# Altium PCB CU.PcbDoc
Units mil, origin at the board's own origin, x right, y up, seen from the top; angles counter-clockwise.
Board outline 2559.06 x 1574.8 mil, 2 copper layers (Top Layer, Bottom Layer); 36 components, 43 nets, 187 pads, 3 vias.
Unrouted connection lines stored in the file: 3.
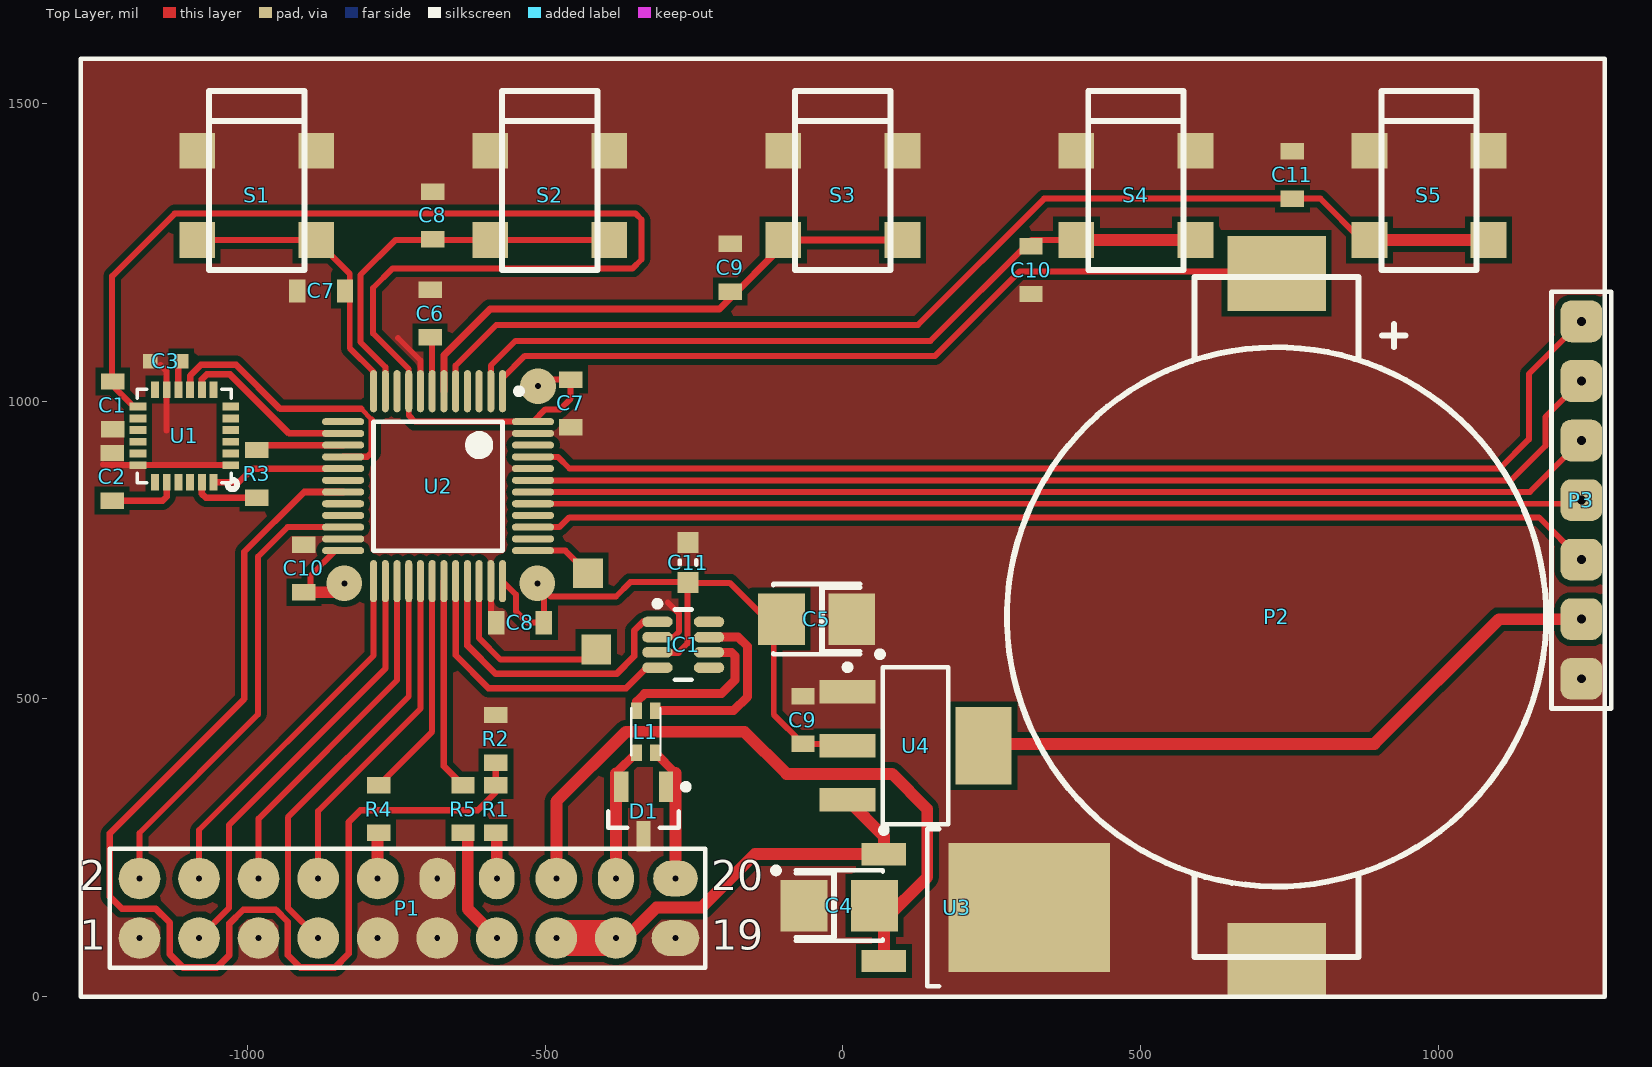
[diagram p0: Top Layer view]
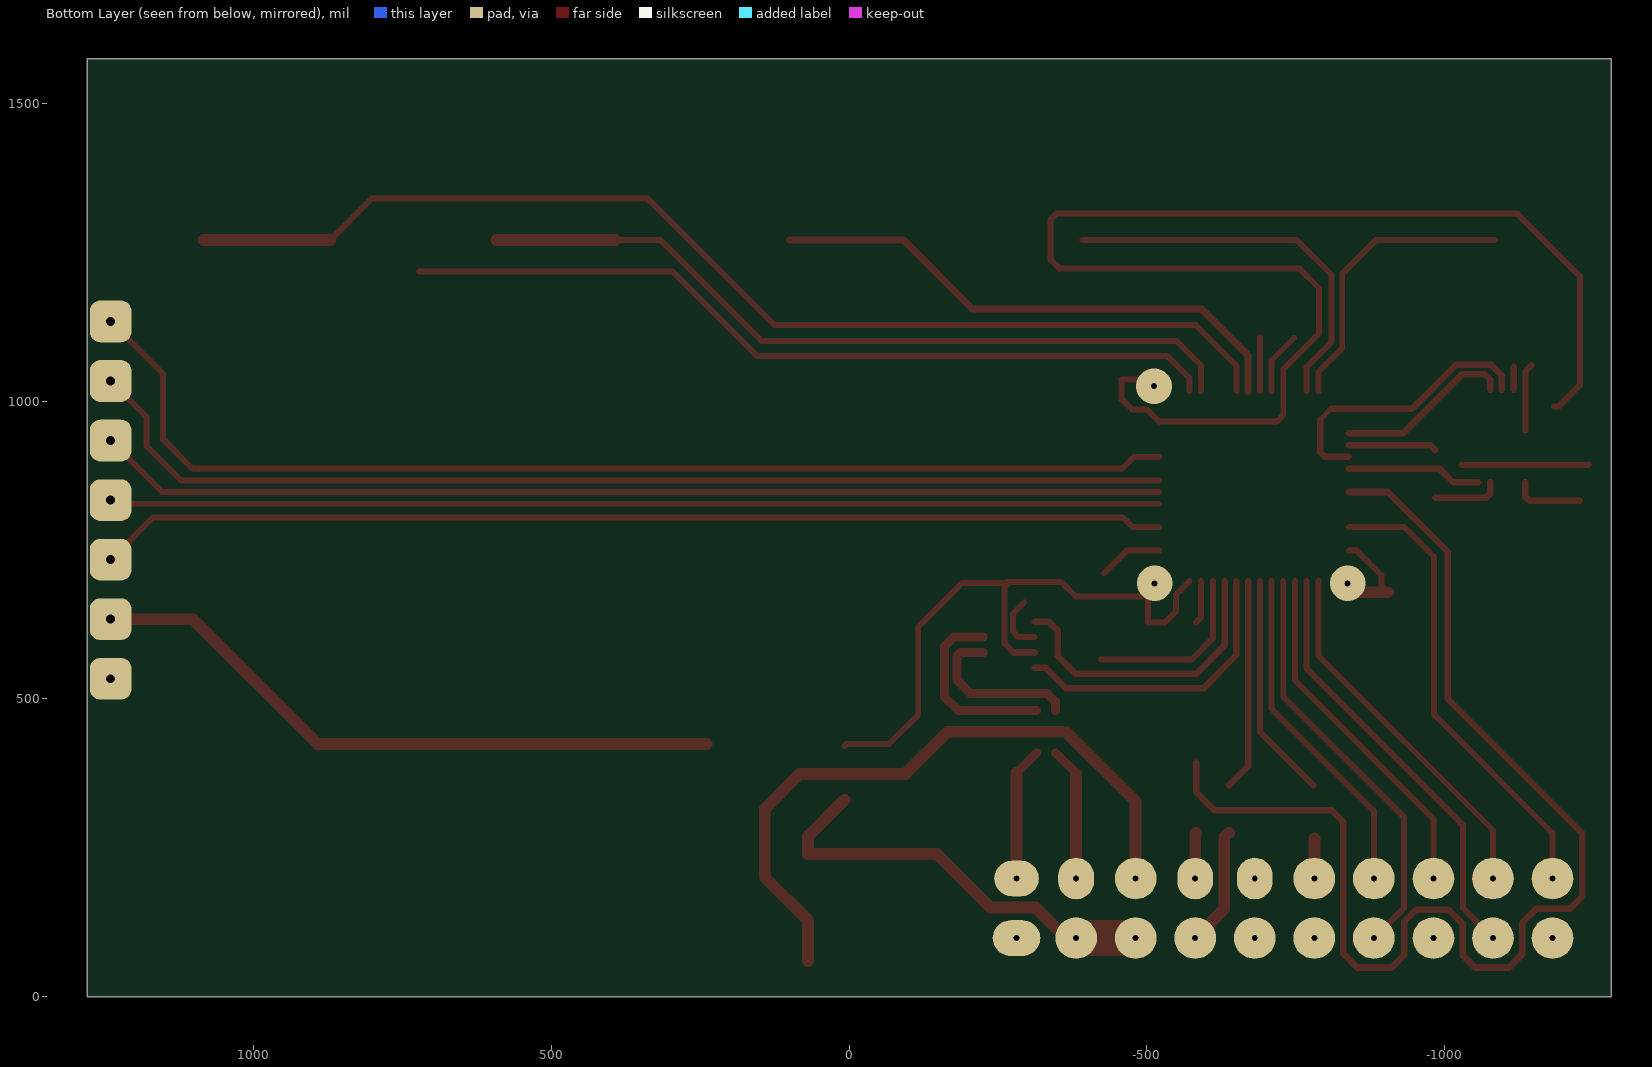
[diagram p1: Bottom Layer view, seen from below]

## Layer stack, top to bottom
Top Solder: solder mask 0.4, Solder Resist, Dk 3.5
Top Layer: signal copper 1.4
Dielectric 1: dielectric 12.6, FR-4, Dk 4.8
Bottom Layer: signal copper 1.4
Bottom Solder: solder mask 0.4, Solder Resist, Dk 3.5

## Board outline
-1279.53,0 1279.53,0 1279.53,1574.8 -1279.53,1574.8

## Design rules (kind name [scope] priority, off if disabled: settings)
Clearance [All] p1: gap=5 except(10: Arc-Poly Track-Poly SMDPad-Poly THPad-Poly Via-Poly Fill-Poly Poly-Poly)
ComponentClearance [All] p1 off: gap=10 collisioncheckmode=3 verticalgap=10 showdistances=FALSE
Height [All] p1 off: minheight=0 maxheight=1000 prefheight=500
PolygonConnect [All] p1: connectstyle=Direct reliefconductorwidth=10 reliefentries=4 polygonreliefangle="90 Angle" airgapwidth=10
RoutingVias [All] p1: holewidth=28 width=60 viastyle="Through Hole" minholewidth=1 minwidth=1 maxholewidth=280 maxwidth=500
SolderMaskExpansion [All] p1: expansion=4
Width [All] p1: maxlimit=200 minlimit=5 preferedwidth=10
28 further rules are at their usual default settings.

## Classes and differential pairs
net class CAN: CAN_RX CAN_TX

## Components (designator, comment, footprint, x,y, rotation, side; value= is the part's Value field where it differs from the comment)
C1 "Cap402" 0603x -1226,993 r90 top
C2 "Cap603" 0603x -1227,873 r270 top
C3 "Cap402" 0402x -1137,1067 r180 top
C4 "Cap" RR_B -6,153 r0 top
C5 "Cap" RR_B -44,634 r180 top
C6 "Cap" 0603x -693,1147 r270 top
C7 "Cap" 0603x -876,1185 r180 top
C7 "Cap" 0603x -457.02,996.17 r90 top
C8 "Cap" 0603x -689,1312 r90 top
C8 "Cap" 0603x -542.02,628.17 r0 top
C9 "Cap" 0603x -189,1224 r90 top
C9 "Cap" 0603x -66.93,464.57 r270 top
C10 "Cap" 0603x 316,1220 r270 top
C10 "Cap" 0603x -905.02,719.17 r270 top
C11 "Cap" 0603x 755,1380 r90 top
C11 "0.1u" CAPC1608X08N(0603) -260,729 r270 top
D1 "NUP2105LT1G" SOT23_N -334.65,311.02 r270 top
IC1 "TCAN332GDCNT" SOT23-8_L -268,591 r0 top
L1 "CMC 100MA 2LN 90 OHM SMD" Choke_smd -330.71,444.88 r90 top
P1 "Header 10X2" HDR2X10 -1181.1,98.43 r0 top
P2 "Header 2" RR_CONN_2032 728.35,637.8 r270 top
P3 "Header 7" HDR1X7 1240.16,1133.86 r270 top locked
R1 "Res1" 0603x -582.68,314.96 r90 top
R2 "Res1" 0603x -582.68,433.07 r90 top
R3 "Res1" 0603x -984,878 r90 top
R4 "Res1" 0603x -779.53,314.96 r90 top
R5 "Res1" 0603x -637.8,314.96 r90 top
S1 "SW-PB" BUTTON_SMD -984.25,1220.47 r180 top
S2 "SW-PB" BUTTON_SMD -492.13,1220.47 r180 top
S3 "SW-PB" BUTTON_SMD 0,1220.47 r180 top
S4 "SW-PB" BUTTON_SMD 492.13,1220.47 r180 top
S5 "SW-PB" BUTTON_SMD 984.25,1220.47 r180 top
U1 "MPU-6000" IMU-3000 -1105.83,941.64 r180 top
U2 "STM32F303C8T6" LQFP48_N -679.71,857.27 r270 top
U3 "LM78M05CDT/NOPB" TD03B_N 240.16,149.61 r0 top
U4 "LM1117IMP-5.0/NOPB" MP04A_N 122.05,421.26 r0 top

## Footprints (in the part's own frame and the unit in brackets; to place one, negate y for a bottom-side part, rotate by r counter-clockwise, add the part's x,y. Pads: shape width x height; smd on the part's side, far side on the other; paste and mask are expansions set on the pad)
0402x [mm] "Chip Capacitor, Body 1.0x0.5mm, IPC Medium Density"
  rect 0.6x0.6 smd: 1(-0.66,0) 2(0.66,0)
  body extent -0.5,-0.25 0.5,0.25, height 0.6
0603x [mm] "Chip Resistor; Body 1.6 x 0.8 mm (LxW typ)"
  rect 0.7x1 smd: 1(-1.016,0) 2(1.016,0)
BUTTON_SMD [mil]
  rect 60x60 smd: 1(-100,-200) 1(100,-200) 2(-100,-50) 2(100,-50)
  silkscreen extent -80,-300 80,0
CAPC1608X08N(0603) [mm] "Chip Capacitor, 2-Leads, Body 1,60x0,80mm, IPC Medium Density"
  rect 0.9x0.9 smd: 1(-0.85,0) 2(0.85,0)
  silkscreen extent -0.1,-0.35 0.1,0.35, body extent -0.8,-0.4 0.8,0.4, height 0.8
Choke_smd [mm] "Smd choke"
  rect 0.7x0.45 smd: 1(-0.9,0.4) 2(-0.9,-0.4) 3(0.9,-0.4) 4(0.9,0.4)
  silkscreen extent -1,-0.63 1,0.63
HDR1X7 [mil] "Connector; Header; 7 Position"
  rrect50% 70x70 hole 15: 1(0,0) 2(100,0) 3(200,0) 4(300,0) 5(400,0) 6(500,0) 7(600,0)
  silkscreen extent -50,-50 650,50
HDR2X10 [mil] "Connector; Header; 10x2 Position"
  round 70 hole 10: 1(0,0) 2(0,100) 3(100,0) 4(100,100) 5(200,0) 6(200,100) 7(300,0) 8(300,100) 9(400,0) 10(400,100) 11(500,0) 13(600,0) 15(700,0) 16(700,100) 17(800,0)
  oval 60x70 hole 10: 12(500,100) 14(600,100) 18(800,100)
  oval 80x60 hole 10: 19(900,0)
  oval 75x60 hole 10: 20(900,100)
  silkscreen extent -50,-50 950,150
IMU-3000 [mm]
  rect 0.711x0.337 smd paste-0.03 mask+0.04: 1(-1.975,1.25) 2(-1.975,0.75) 3(-1.975,0.25) 4(-1.975,-0.25) 5(-1.975,-0.75) 6(-1.975,-1.25) 13(1.975,-1.25) 14(1.975,-0.75) 15(1.975,-0.25) 16(1.975,0.25) 17(1.975,0.75) 18(1.975,1.25)
  rect 0.337x0.711 smd paste-0.03 mask+0.04: 7(-1.25,-1.975) 8(-0.75,-1.975) 9(-0.25,-1.975) 10(0.25,-1.975) 11(0.75,-1.975) 12(1.25,-1.975) 19(1.25,1.975) 20(0.75,1.975) 21(0.25,1.975) 22(-0.25,1.975) 23(-0.75,1.975) 24(-1.25,1.975)
  silkscreen extent -2.25,-2 2,2.27, body extent -2,-2 2,2, height 0.95
LQFP48_N [mm] "Thin QFP, 48-Leads, Body 7x7mm, Pitch 0.5mm, IPC Medium Density"
  oval 1.8x0.3 smd: 1(-4.05,2.75) 2(-4.05,2.25) 3(-4.05,1.75) 4(-4.05,1.25) 5(-4.05,0.75) 6(-4.05,0.25) 7(-4.05,-0.25) 8(-4.05,-0.75) 9(-4.05,-1.25) 10(-4.05,-1.75) 11(-4.05,-2.25) 12(-4.05,-2.75) 25(4.05,-2.75) 26(4.05,-2.25) 27(4.05,-1.75) 28(4.05,-1.25) 29(4.05,-0.75) 30(4.05,-0.25) 31(4.05,0.25) 32(4.05,0.75) 33(4.05,1.25) 34(4.05,1.75) 35(4.05,2.25) 36(4.05,2.75)
  oval 0.3x1.8 smd: 13(-2.75,-4.05) 14(-2.25,-4.05) 15(-1.75,-4.05) 16(-1.25,-4.05) 17(-0.75,-4.05) 18(-0.25,-4.05) 19(0.25,-4.05) 20(0.75,-4.05) 21(1.25,-4.05) 22(1.75,-4.05) 23(2.25,-4.05) 24(2.75,-4.05) 37(2.75,4.05) 38(2.25,4.05) 39(1.75,4.05) 40(1.25,4.05) 41(0.75,4.05) 42(0.25,4.05) 43(-0.25,4.05) 44(-0.75,4.05) 45(-1.25,4.05) 46(-1.75,4.05) 47(-2.25,4.05) 48(-2.75,4.05)
  silkscreen extent -4.17,-2.75 2.75,3.58, body extent -3.5,-3.5 3.5,3.5, height 1.6
MP04A_N [mm] "SOT223, 4-Leads, Body 6.5x3.5mm, Pitch 2.3mm, Lead Span 7mm, IPC Medium Density"
  rect 2.4x1 smd: 1(-2.9,2.3) 2(-2.9,0) 3(-2.9,-2.3)
  rect 2.4x3.3 smd: 4(2.9,0)
  silkscreen extent -3.02,-3.35 1.4,3.47, body extent -1.85,-3.35 1.85,3.35, height 1.8
RR_B [mm] "Capacitor, SM Tantalum; Body 3.5 x 2.8 mm (LxW typ)"
  rect 2x2.2 smd: 1(-1.5,0) 2(1.5,0)
  silkscreen extent -2.82,-1.5 1.85,1.62, body extent -1.5,-1.5 1.5,1.5, height 2.1
RR_CONN_2032 [mm]
  rect 3.2x4.2 smd: 1(-14.65,0) 2(14.65,0)
  silkscreen extent -14.5,-11.5 14.5,11.5, body extent -14.5,-11.51 14.48,11.51, height 4.8
SOT23-8_L [mm] "SOP, 8-Leads, Body 2.9x1.6mm, Pitch 0.65mm, IPC High Density"
  oval 1.3x0.45 smd: 1(-1.1,0.975) 2(-1.1,0.325) 3(-1.1,-0.325) 4(-1.1,-0.975) 5(1.1,-0.975) 6(1.1,-0.325) 7(1.1,0.325) 8(1.1,0.975)
  silkscreen extent -1.22,-1.5 0.35,1.87, body extent -0.88,-1.5 0.88,1.5, height 1.45
SOT23_N [mm] "SOT23, 3-Leads, Body 2.9x1.3mm, Pitch 0.95mm, Lead Span 2.3mm, IPC Medium Density"
  rect 1.3x0.6 smd: 1(-1.05,0.95) 2(-1.05,-0.95) 3(1.05,0)
  silkscreen extent -1.17,-1.5 0.7,1.92, body extent -0.7,-1.5 0.7,1.5, height 1.1
TD03B_N [mm] "D-PAK, 4-Leads, Body 6.1x6.6mm, Pitch 2.29mm, Lead Span 9.7mm, IPC Medium Density"
  rect 1.9x0.95 smd: 1(-4.35,2.28) 3(-4.35,-2.28)
  rect 6.9x5.5 smd: 4(1.85,0)
  silkscreen extent -4.47,-3.35 -2,3.43, body extent -2.5,-3.35 3.7,3.35, height 2.38

## Part data
C1 C2 C3: "Capacitor SMD"
C4 C5 C6 C7 C7 C8 C8 C9 C9 C10 C10 C11: "Capacitor"
C11: library part "Ceramic Chip Capacitor"
D1: library part BAT54A, "Schottky Barrier Double Diode"
L1: library part Choke
P1: "Header, 10-Pin, Dual row"
P2: "Header, 2-Pin"
P3: "Header, 7-Pin"
R1 R2 R3 R4 R5: "Resistor"
S1 S2 S3 S4 S5: "Switch"
U1: library part MPU-3/6000, "Invensense MPU-3/6000,  3-axis Gyros & Accel on 6000"
U2: library part STM32F103C6T6, "STM32 ARM-based 32-bit MCU with 32 Kbytes Flash, 48-pin LQFP, Industrial Temperature"
U3: "3-Terminal Positive Voltage Regulators, 3-pin TO-252, Pb-Free"
U4: "800mA Low-Dropout Linear Regulator, 4-pin SOT-223, Pb-Free"

## Free pads (board coordinates)
  rect 50x50 smd: 0(-428.02,711.17) 1(-414,583)

## Via types
v1: diameter 60, hole 10, Top Layer to Bottom Layer, 3 vias

## Nets (pads, with @x,y where several pads share a name; then routed paths per layer and width w, separated by ;. In a path a pad name is that pad's centre, name@x,y a point inside that pad or via, vN(x,y) a via of type N, cw(c..) or ccw(c..) an arc to the next point about the centre after c; other vN are vias at no path point)
3.3V: C1.2 C5.2 C7.2@-457.02,1036.17 C8.2@-502.02,628.17 C9.2@-66.93,424.57 C10.2@-905.02,679.17 C11.2@-260,695.54 IC1.3 P3.6 U1.13 U2.9 U2.24 U2.36 U2.48 U4.2 U4.4 | length 4675.5
  Top Layer w10: U1.13 -1190.85,990.85 -1227,1027 -1227,1210 -1122,1315 -348,1315 -338,1305 -338,1238 -353,1223 -756,1223 -789,1190 -789,1114 -728.92,1053.92 U2.9 -728.92,976.07 -718.39,965.54 U2.48 -499.63,986.17 -475.02,986.17 -457.02,1004.17 -457.02,1036.17 -501.02,1036.17 v1(-512.02,1025.17) ; C10.2@-905.02,679.17 -894.02,690.17 -894.02,707.17 -852.19,749 U2.24 ; U2.36 -549.02,675.4 -549.02,647.17 -530.02,628.17 -502.02,628.17 v1@-502.02,683.17 ; v1(-513.02,694.17) v1@-502.02,683.17 ; -275.8,578.2 -261,593 C11.2@-261,689.46 ; U4.2 4.57,424.57 -66.93,424.57 -116,473.64 -116,621 -190,695 -266.54,695 -267.54,696 -357,696 -381,672 -490.86,672 v1@-502.02,683.17
  Top Layer w12: IC1.3 -275.8,578.2 ; C11.2@-266.54,695 C11.2@-261,689.46
  Top Layer w20: C10.2@-905.02,679.17 -852.02,679.17 v1(-837.02,694.17) ; U4.4@239.53,424.57 892.57,424.57 1101.86,633.86 P3.6
5V: C4.2 P1.16 U3.3 | length 1139.9
  Top Layer w20: P1.16 -481.1,327.9 -364.12,444.88 -165.35,444.88 -94.49,374.02 82.68,374.02 141.73,314.96 141.73,200.79 68.9,127.95 U3.3
12V: P1.15 P1.17 U3.1 U4.3 | length 725
  Top Layer w20: P1.17 -364.57,98.43 -313.39,149.61 -237.39,149.61 -147.63,239.37 U3.1 68.9,269.68 U4.3
  Top Layer w60: P1.15 P1.17
ACCEL: P1.14 R1.1 | length 77.2
  Top Layer w20: R1.1 -581.1,273.39 P1.14
B01: C7.1@-836,1185 S1.2 U2.12 | length 493.6
  Top Layer w10: S1.2@-1084.25,1270.47 -884.25,1270.47 -828,1214.22 -828,1089 -787.98,1048.98 U2.12
B1: P1.3 U2.26 | length 729
  Top Layer w10: P1.3 -1031,148.53 -1031,288 -768.29,550.71 U2.26
B02: C8.1@-689,1272 S2.2 U2.11 | length 654.7
  Top Layer w10: U2.11 -768.29,1057.43 -810,1099.14 -810,1212 -751.53,1270.47 -592.13,1270.47 S2.2@-392.13,1270.47
B2: P1.4 U2.25 | length 620.8
  Top Layer w10: P1.4 -1081.1,279.9 -787.98,573.02 U2.25
B03: C9.1@-189,1184 S3.2 U2.6 | length 910.4
  Top Layer w12: U2.6 -669.87,1077.13 -592,1155 -207,1155 -91.53,1270.47 S3.2@100,1270.47
B3: P1.2 U2.22 | length 786.3
  Top Layer w10: P1.2 -1181.1,274.9 -982,474 -982,739 -932.63,788.37 U2.22
B04: C10.1@316,1260 S4.2 U2.2 | length 1313.6
  Top Layer w10: U2.2 -591.13,1059.87 -550,1101 147,1101 316.47,1270.47 S4.2@392.13,1270.47
  Top Layer w20: S4.2@392.13,1270.47 S4.2@592.13,1270.47
B4: P1.7 U2.28 | length 704.6
  Top Layer w10: P1.7 -932,149.32 -932,301 -728.92,504.08 U2.28
B05: C11.1@755,1340 S5.2 U2.5 | length 1922.4
  Top Layer w10: U2.5 -650.18,1059.82 -582,1128 126,1128 338,1340 802,1340 S5.2@871.53,1270.47
  Top Layer w20: S5.2@871.53,1270.47 884.25,1270.47 S5.2@1084.25,1270.47
B5: P1.8 U2.29 | length 570.6
  Top Layer w10: P1.8 -881.1,311.9 -709.24,483.76 U2.29
B6: P1.6 U2.27 | length 595.7
  Top Layer w10: P1.6 -981.1,298.9 -748.61,531.39 U2.27
CAN_H: D1.1 L1.2 P1.20 | length 225
  Top Layer w15: L1.2 -281.1,375.59
  Top Layer w20: P1.20 -281.1,375.59
CAN_L: D1.2 L1.1 P1.18 | length 225.4
  Top Layer w15: D1.2@-381.1,374.8 L1.1
  Top Layer w20: P1.18 D1.2@-381.1,374.8
CAN_RX: IC1.4 U2.32 | length 500.7
  Top Layer w11: U2.32 -650.18,573.18 -595,518 -364,518 -329.39,552.61 IC1.4
CAN_TX: IC1.1 U2.33 | length 508.6
  Top Layer w11: U2.33 -630.5,589.5 -583,542 -380,542 -350.5,571.5 -350.5,614.5 -335.61,629.39 IC1.1
CLK: P3.5 U2.39 | length 1796.8
  Top Layer w10: U2.39 -476,788.37 -459.37,805 1169.01,805 P3.5
CS: P3.1 U2.45 | length 1935
  Top Layer w10: U2.45 -478.48,906.48 -459,887 1103,887 1152,936 1152,1045.7 P3.1
D/C: P3.2 U2.43 | length 1858
  Top Layer w10: U2.43 1122.11,867.11 1179.65,924.65 1179.65,973.35 P3.2
GND: C1.1 C2.1 C3.2 C4.1 C5.1 C6.1 C7.1@-457.02,956.17 C7.2@-916,1185 C8.1@-582.02,628.17 C8.2@-689,1352 C9.1@-66.93,504.57 C9.2@-189,1264 C10.1@-905.02,759.17 C10.2@316,1180 C11.1@-260,762.46 C11.2@755,1420 D1.3 IC1.2 P1.1 P1.5 P1.9 P1.11 P1.12 P1.19 P2.2 P3.7 R2.2 S1.1 S2.1 S3.1 S4.1 S5.1 U1.1 U1.11 U1.18 U2.8 U2.23 U2.35 U2.44 U2.47 U3.4 U4.1 | length 604.7
  Top Layer w10: -1242,894 -1240.43,892.43 U1.18 U1.1 ; -1146,1061 -1135.36,1050.36 U1.11 -1135.36,950.64 ; -747,1106 -709.24,1068.24 U2.8 ; U2.35 -591.13,637.27 C8.1@-582.02,628.17 ; IC1.2 -284.2,603.8 -275,613 -275,643 -294,662
L_PWM: P1.13 R5.1 | length 200
  Top Layer w20: R5.1 -629.92,267.09 -629.92,147.24 P1.13
MOSI: P3.4 U2.41 | length 1763
  Top Layer w10: U2.41 1234.04,827.74 P3.4
NetC2_2: C2.2 U1.20 | length 118.6
  Top Layer w11: C2.2 -1142,833 -1135.36,839.64 U1.20
NetC3_1: C3.1 U1.10 | length 38.3
  Top Layer w11: U1.10 C3.1@-1115.68,1057.68
NetC6_2: C6.2 U2.7 | length 90.3
  Top Layer w10: U2.7 C6.2@-689.55,1107
NetIC1_6: IC1.6 L1.4 | length 282
  Top Layer w15: L1.4 -346.46,495.54 -333,509 -204,509 -181,532 -181,572 -187.21,578.21 IC1.6
NetIC1_7: IC1.7 L1.3 | length 320
  Top Layer w15: L1.3 -183.69,480.32 -160,504 -160,588 -175.8,603.8 IC1.7
NetP2_1: P2.1 U2.1 | length 1389.6
  Top Layer w10: U2.1 -571.44,1038.56 -534,1076 155,1076 297,1218 P2.1@722,1218
NetR1_2: R1.2 R2.1 U2.19 | length 2054
  Top Layer w11: U2.19 -904.57,847.43 -1005,747 -1005,500 -1231,274 -1231,168 -1211,148 -1154,148 -1130,124 -1130,71 -1108,49 -1051,49 -1030,70 -1030,123 -1007,146 -952,146 -932,126 -932,70 -911,49 -853,49 -830,72 -830,293 -810,313 -613,313 -582.68,343.32 R1.2 R2.1
NetR3_1: R3.1 U1.23 | length 114.5
  Top Layer w11: U1.23 -1076.31,844.31 -1070,838 R3.1
NetR3_2: R3.2 U2.15 | length 148.2
  Top Layer w11: R3.2 -975.83,926.17 U2.15
NetR4_2: R4.2 U2.30 | length 380.1
  Top Layer w10: R4.2 -689.55,444.94 U2.30
NetR5_2: R5.2 U2.31 | length 356.1
  Top Layer w11: U2.31 -669.87,387.03 R5.2
NetU1_8: U1.8 U2.14 | length 299
  Top Layer w11: U1.8 -1076.31,1036.69 -1068,1045 -1029,1045 -929.85,945.85 U2.14
NetU1_9: U1.9 U2.16 | length 480.6
  Top Layer w8: -809,987 -790.87,968.87
  Top Layer w11: U1.9 -1095.99,1043.01 -1078,1061 -1019,1061 -945,987 -809,987 ; U2.16 -798.47,906.48 -790.87,914.08 -790.87,968.87
NetU1_24: U1.24 U2.17 | length 227
  Top Layer w11: U1.24 -1014.3,863.88 -991.39,886.8 U2.17
RES: P3.3 U2.42 | length 1796.2
  Top Layer w10: U2.42 1153.73,847.43 P3.3
SWCLK: pad.0 U2.37 | length 107.9
  Top Layer w10: U2.37 -465.86,749 pad.0
SWDIO: pad.1 U2.34 | length 298.6
  Top Layer w10: U2.34 -610.81,601.95 -574.86,566 pad.1@-423,566
TACHO: P1.10 R4.1 | length 69.3
  Top Layer w10: R4.1@-781.1,265.51 R4.1@-779.53,267.09
  Top Layer w20: P1.10 R4.1@-781.1,265.51
pads on no net: IC1.5 IC1.8 U1.2 U1.3 U1.4 U1.5 U1.6 U1.7 U1.12 U1.14 U1.15 U1.16 U1.17 U1.19 U1.21 U1.22 U2.3 U2.4 U2.10 U2.13 U2.18 U2.20 U2.21 U2.38 U2.40 U2.46

## Polygon pours and split planes (outlines as drawn)
GND on Top Layer "Top Layer-No Net" (solid, remove dead copper, pour order 3): -1279.53,1574.8 -1279.53,0 1279.53,0 1279.53,1574.8 -1279.53,1574.8

## Silkscreen, mask and mechanical layers (free items; w line width, h text height)
Top Overlay:
  the board outline again, w7.87

## Text inside footprints (layer, text, board x,y; h text height)
P1: Top Overlay "20" at -221.1,178.43 h50; Top Overlay "19" at -221.1,78.43 h50; Top Overlay "1" at -1281.1,78.43 h50; Top Overlay "2" at -1281.1,178.43 h50